# EAGLE board uvswitch_pcb (EAGLE 4.11)
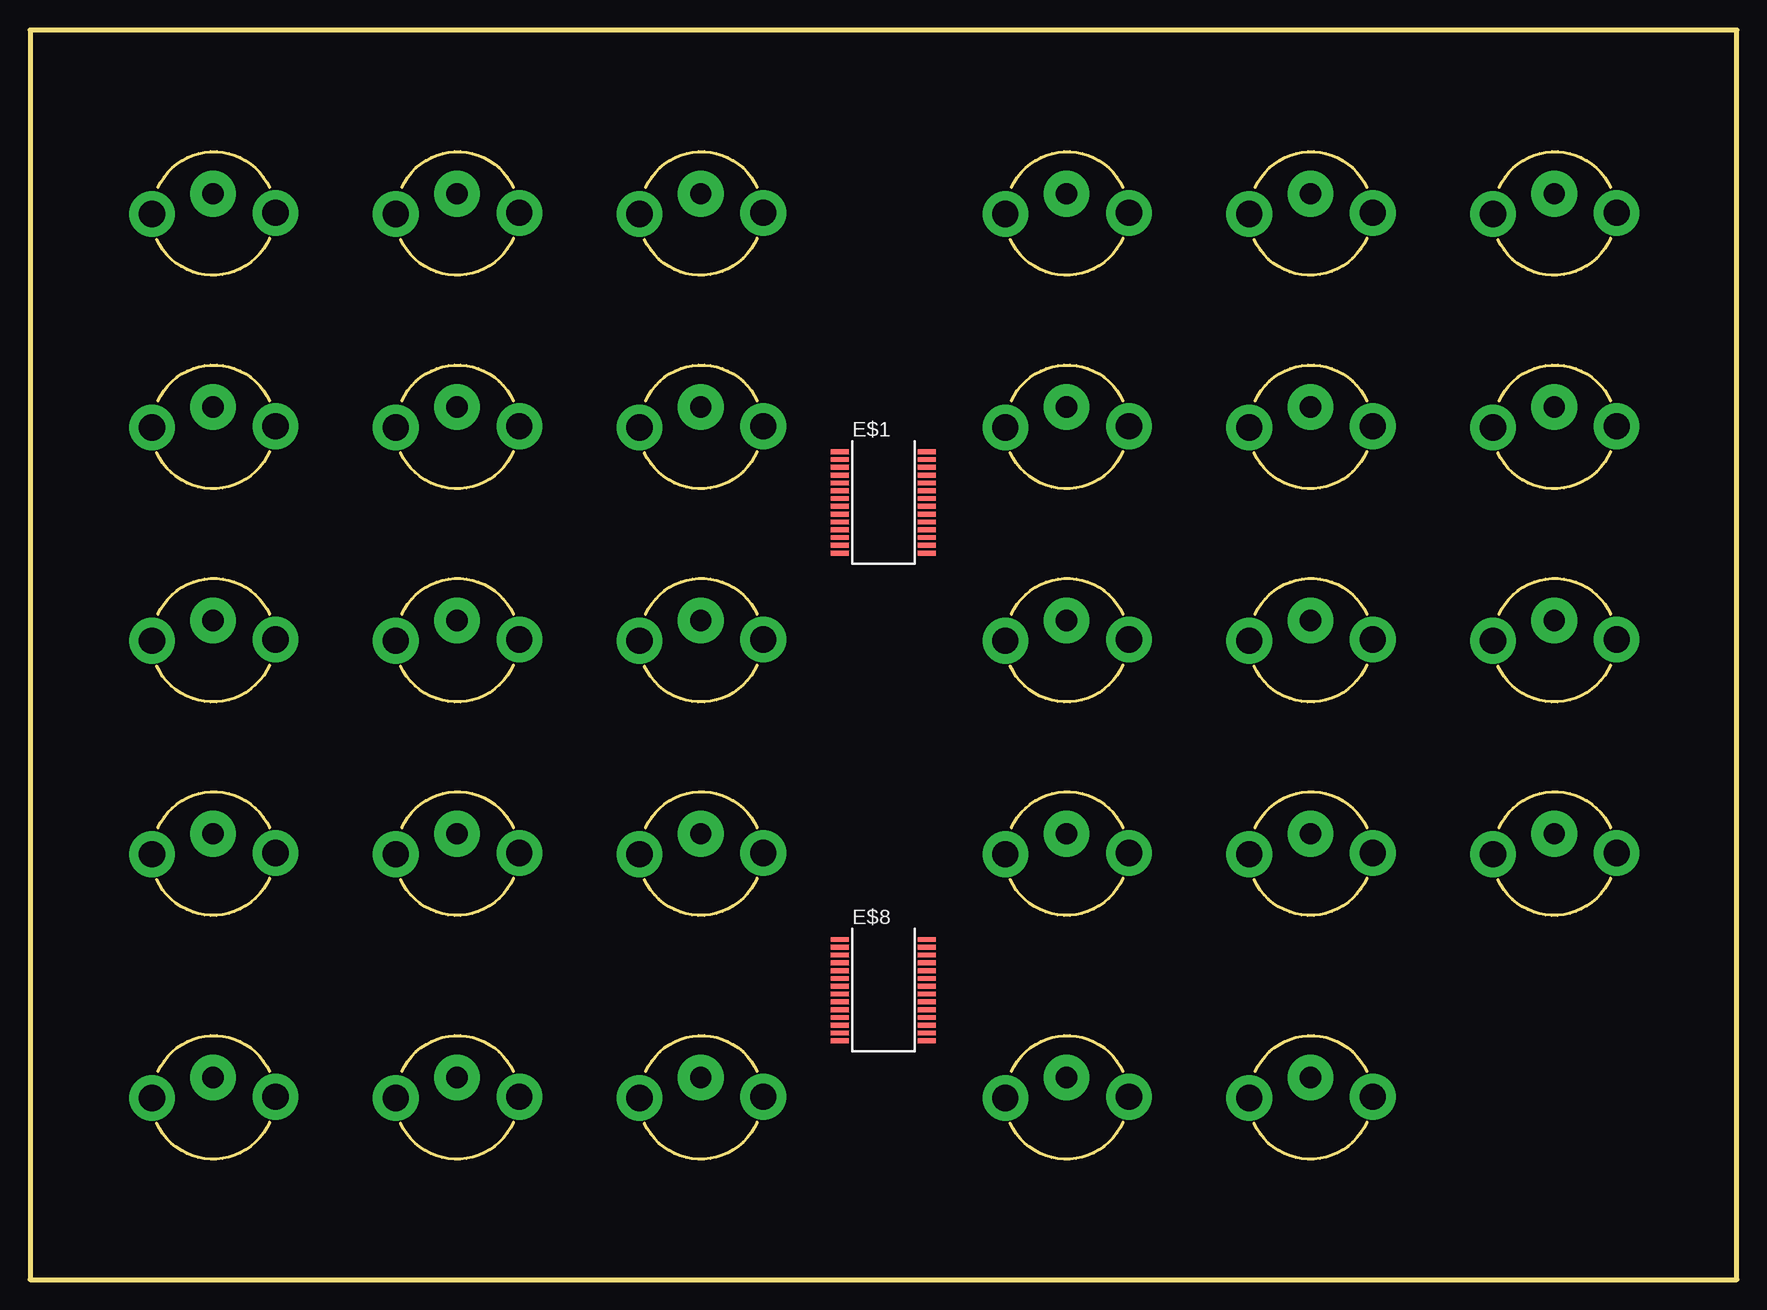
[diagram p0: board, top side]

Size 142.24 x 104.14 mm. Coordinates in mm from the lower left corner, seen from the top.
Outline: 51.3,73.22 arc-131 60.6,73.22
Outline: 40.28,69.02 arc-132 30.88,68.92
Outline: 30.98,73.22 arc-131 40.28,73.22
Outline: 19.96,69.02 arc-132 10.56,68.92
Outline: 10.66,73.22 arc-131 19.96,73.22
Outline: 19.96,51.24 arc-132 10.56,51.14
Outline: 10.66,55.44 arc-131 19.96,55.44
Outline: 40.28,51.24 arc-132 30.88,51.14
Outline: 30.98,55.44 arc-131 40.28,55.44
Outline: 60.6,51.24 arc-132 51.2,51.14
Outline: 60.6,33.46 arc-132 51.2,33.36
Outline: 51.3,37.66 arc-131 60.6,37.66
Outline: 40.28,33.46 arc-132 30.88,33.36
Outline: 30.98,37.66 arc-131 40.28,37.66
Outline: 19.96,33.46 arc-132 10.56,33.36
Outline: 10.66,37.66 arc-131 19.96,37.66
Outline: 19.96,13.14 arc-132 10.56,13.04
Outline: 40.28,13.14 arc-132 30.88,13.04
Outline: 30.98,17.34 arc-131 40.28,17.34
Outline: 60.6,13.14 arc-132 51.2,13.04
Outline: 51.3,17.34 arc-131 60.6,17.34
Outline: 131.72,51.24 arc-132 122.32,51.14
Outline: 122.42,55.44 arc-131 131.72,55.44
Outline: 111.4,51.24 arc-132 102,51.14
Outline: 102.1,55.44 arc-131 111.4,55.44
Outline: 91.08,51.24 arc-132 81.68,51.14
Outline: 19.96,86.8 arc-132 10.56,86.7
Outline: 10.66,91 arc-131 19.96,91
Outline: 40.28,86.8 arc-132 30.88,86.7
Outline: 30.98,91 arc-131 40.28,91
Outline: 60.6,86.8 arc-132 51.2,86.7
Outline: 51.3,91 arc-131 60.6,91
Outline: 131.72,86.8 arc-132 122.32,86.7
Outline: 122.42,91 arc-131 131.72,91
Outline: 111.4,86.8 arc-132 102,86.7
Outline: 102.1,91 arc-131 111.4,91
Outline: 91.08,86.8 arc-132 81.68,86.7
Outline: 81.78,91 arc-131 91.08,91
Outline: 81.78,73.22 arc-131 91.08,73.22
Outline: 111.4,69.02 arc-132 102,68.92
Outline: 102.1,73.22 arc-131 111.4,73.22
Outline: 131.72,69.02 arc-132 122.32,68.92
Outline: 122.42,73.22 arc-131 131.72,73.22
Outline: 91.08,69.02 arc-132 81.68,68.92
Outline: 51.3,55.44 arc-131 60.6,55.44
Outline: 81.78,55.44 arc-131 91.08,55.44
Outline: 60.6,69.02 arc-132 51.2,68.92
Outline: 131.72,33.46 arc-132 122.32,33.36
Outline: 122.42,37.66 arc-131 131.72,37.66
Outline: 111.4,33.46 arc-132 102,33.36
Outline: 102.1,37.66 arc-131 111.4,37.66
Outline: 81.78,37.66 arc-131 91.08,37.66
Outline: 111.4,13.14 arc-132 102,13.04
Outline: 102.1,17.34 arc-131 111.4,17.34
Outline: 91.08,13.14 arc-132 81.68,13.04
Outline: 81.78,17.34 arc-131 91.08,17.34
Outline: 10.66,17.34 arc-131 19.96,17.34
Outline: 0,0 142.24,0 142.24,104.14 0,104.14 0,0
Outline: 91.08,33.46 arc-132 81.68,33.36 arc132 91.08,33.46
Copper layers (1*16): Top 0.035mm / dielectric 1.5mm / Bottom 0.035mm
Design rules "default": minimum track width 10mil, minimum drill 24mil, track to track 8mil, track to pad 8mil, pad to pad 8mil, via to via 8mil, smd to smd 8mil, copper to edge 40mil, drill to drill 8mil, minimum pad ring 10mil, minimum via ring 8mil, stop-mask expansion 4mil, vias tented up to drill 0mil, thermal gap 10mil

## Footprints (pad centres in the part's own frame; a part is rotated, then mirrored left to right if it is on the bottom)
SSOP28 = smd 0.4 x 1.5: 1 -4.225,-3.625; 2 -3.575,-3.625; 3 -2.925,-3.625; 4 -2.275,-3.625; 5 -1.625,-3.625; 6 -0.975,-3.625; 7 -0.325,-3.625; 8 0.325,-3.625; 9 0.975,-3.625; 10 1.625,-3.625; 11 2.275,-3.625; 12 2.925,-3.625; 13 3.575,-3.625; 14 4.225,-3.625; 15 4.225,3.625; 16 3.575,3.625; 17 2.925,3.625; 18 2.275,3.625; 19 1.625,3.625; 20 0.975,3.625; 21 0.325,3.625; 22 -0.325,3.625; 23 -0.975,3.625; 24 -1.625,3.625; 25 -2.275,3.625; 26 -2.925,3.625; 27 -3.575,3.625; 28 -4.225,3.625

## Placement (x,y rotation side)
E$1  [SSOP28]  71.12,64.77 270 top
E$8  [SSOP28]  71.12,24.13 270 top

## Library data of the parts
E$1 E$8 = maxim

## Tracks (layer width: path | path; a pad name or v marks a point on that pad's centre or on a via)
S$1  (via drill 2.18 pad 3.81)
  other vias: 50.8,71.02
S$2  (via drill 2.18 pad 3.81)
  other vias: 61.1,71.12 61.1,53.34
S$3  (via drill 1.78 pad 3.81)
  other vias: 55.9,72.72
S$4  (via drill 2.18 pad 3.81)
  other vias: 30.48,71.02
S$5  (via drill 2.18 pad 3.81)
  other vias: 40.78,71.12
S$6  (via drill 1.78 pad 3.81)
  other vias: 35.58,72.72
S$7  (via drill 2.18 pad 3.81)
  other vias: 10.16,71.02
S$8  (via drill 2.18 pad 3.81)
  other vias: 20.46,71.12
S$9  (via drill 1.78 pad 3.81)
  other vias: 15.26,72.72
S$10  (via drill 2.18 pad 3.81)
  other vias: 10.16,53.24
S$11  (via drill 2.18 pad 3.81)
  other vias: 20.46,53.34
S$12  (via drill 1.78 pad 3.81)
  other vias: 15.26,54.94
S$13  (via drill 2.18 pad 3.81)
  other vias: 30.48,53.24
S$14  (via drill 2.18 pad 3.81)
  other vias: 40.78,53.34
S$15  (via drill 1.78 pad 3.81)
  other vias: 35.58,54.94
S$16  (via drill 2.18 pad 3.81)
  other vias: 50.8,53.24
S$17  (via drill 2.18 pad 3.81)
  other vias: 121.92,35.46
S$18  (via drill 1.78 pad 3.81)
  other vias: 55.9,54.94
S$19  (via drill 2.18 pad 3.81)
  other vias: 50.8,35.46
S$20  (via drill 2.18 pad 3.81)
  other vias: 61.1,35.56
S$21  (via drill 1.78 pad 3.81)
  other vias: 55.9,37.16
S$22  (via drill 2.18 pad 3.81)
  other vias: 30.48,35.46
S$23  (via drill 2.18 pad 3.81)
  other vias: 40.78,35.56
S$24  (via drill 1.78 pad 3.81)
  other vias: 35.58,37.16
S$25  (via drill 2.18 pad 3.81)
  other vias: 10.16,35.46
S$26  (via drill 2.18 pad 3.81)
  other vias: 20.46,35.56
S$27  (via drill 1.78 pad 3.81)
  other vias: 15.26,37.16
S$28  (via drill 2.18 pad 3.81)
  other vias: 10.16,15.14
S$29  (via drill 2.18 pad 3.81)
  other vias: 20.46,15.24
S$30  (via drill 1.78 pad 3.81)
  other vias: 15.26,16.84
S$31  (via drill 2.18 pad 3.81)
  other vias: 30.48,15.14
S$32  (via drill 2.18 pad 3.81)
  other vias: 40.78,15.24
S$33  (via drill 1.78 pad 3.81)
  other vias: 35.58,16.84
S$34  (via drill 2.18 pad 3.81)
  other vias: 50.8,15.14
S$35  (via drill 2.18 pad 3.81)
  other vias: 61.1,15.24
S$36  (via drill 1.78 pad 3.81)
  other vias: 55.9,16.84
S$37  (via drill 2.18 pad 3.81)
  other vias: 121.92,53.24
S$38  (via drill 2.18 pad 3.81)
  other vias: 132.22,53.34
S$39  (via drill 1.78 pad 3.81)
  other vias: 127.02,54.94
S$40  (via drill 2.18 pad 3.81)
  other vias: 101.6,53.24
S$41  (via drill 2.18 pad 3.81)
  other vias: 111.9,53.34
S$42  (via drill 1.78 pad 3.81)
  other vias: 106.7,54.94
S$43  (via drill 2.18 pad 3.81)
  other vias: 132.22,35.56
S$44  (via drill 2.18 pad 3.81)
  other vias: 91.58,53.34
S$45  (via drill 1.78 pad 3.81)
  other vias: 86.38,54.94
S$46  (via drill 2.18 pad 3.81)
  other vias: 10.16,88.8
S$47  (via drill 2.18 pad 3.81)
  other vias: 20.46,88.9
S$48  (via drill 1.78 pad 3.81)
  other vias: 15.26,90.5
S$49  (via drill 2.18 pad 3.81)
  other vias: 30.48,88.8
S$50  (via drill 2.18 pad 3.81)
  other vias: 40.78,88.9
S$51  (via drill 1.78 pad 3.81)
  other vias: 35.58,90.5
S$52  (via drill 2.18 pad 3.81)
  other vias: 50.8,88.8
S$53  (via drill 2.18 pad 3.81)
  other vias: 61.1,88.9
S$54  (via drill 1.78 pad 3.81)
  other vias: 55.9,90.5
S$55  (via drill 2.18 pad 3.81)
  other vias: 121.92,88.8
S$56  (via drill 2.18 pad 3.81)
  other vias: 132.22,88.9
S$57  (via drill 1.78 pad 3.81)
  other vias: 127.02,90.5
S$58  (via drill 2.18 pad 3.81)
  other vias: 101.6,88.8
S$59  (via drill 2.18 pad 3.81)
  other vias: 111.9,88.9
S$60  (via drill 1.78 pad 3.81)
  other vias: 106.7,90.5
S$61  (via drill 2.18 pad 3.81)
  other vias: 81.28,88.8
S$62  (via drill 2.18 pad 3.81)
  other vias: 91.58,88.9
S$63  (via drill 1.78 pad 3.81)
  other vias: 86.38,90.5
S$64  (via drill 2.18 pad 3.81)
  other vias: 81.28,71.02 81.28,53.24
S$65  (via drill 2.18 pad 3.81)
  other vias: 91.58,71.12
S$66  (via drill 1.78 pad 3.81)
  other vias: 86.38,72.72
S$67  (via drill 2.18 pad 3.81)
  other vias: 101.6,71.02
S$68  (via drill 2.18 pad 3.81)
  other vias: 111.9,71.12
S$69  (via drill 1.78 pad 3.81)
  other vias: 106.7,72.72
S$70  (via drill 2.18 pad 3.81)
  other vias: 121.92,71.02
S$71  (via drill 2.18 pad 3.81)
  other vias: 132.22,71.12
S$72  (via drill 1.78 pad 3.81)
  other vias: 127.02,72.72
S$73  (via drill 1.78 pad 3.81)
  other vias: 127.02,37.16
S$74  (via drill 2.18 pad 3.81)
  other vias: 101.6,35.46
S$75  (via drill 2.18 pad 3.81)
  other vias: 111.9,35.56
S$76  (via drill 1.78 pad 3.81)
  other vias: 106.7,37.16
S$77  (via drill 2.18 pad 3.81)
  other vias: 91.58,35.56
S$78  (via drill 1.78 pad 3.81)
  other vias: 86.38,37.16
S$79  (via drill 2.18 pad 3.81)
  other vias: 81.28,35.46
S$80  (via drill 2.18 pad 3.81)
  other vias: 101.6,15.14
S$81  (via drill 2.18 pad 3.81)
  other vias: 111.9,15.24
S$82  (via drill 1.78 pad 3.81)
  other vias: 106.7,16.84
S$83  (via drill 2.18 pad 3.81)
  other vias: 81.28,15.14
S$84  (via drill 2.18 pad 3.81)
  other vias: 91.58,15.24
S$85  (via drill 1.78 pad 3.81)
  other vias: 86.38,16.84